# Altium PCB humilityDetector.PcbDoc
Units mil, origin at the board's own origin, x right, y up, seen from the top; angles counter-clockwise.
Board outline 11837.4 x 9083.86 mil, 2 copper layers (Top Layer, Top, Bottom Layer, Bottom); 29 components, 21 nets, 102 pads, 1 vias.
Unrouted connection lines stored in the file: 1.
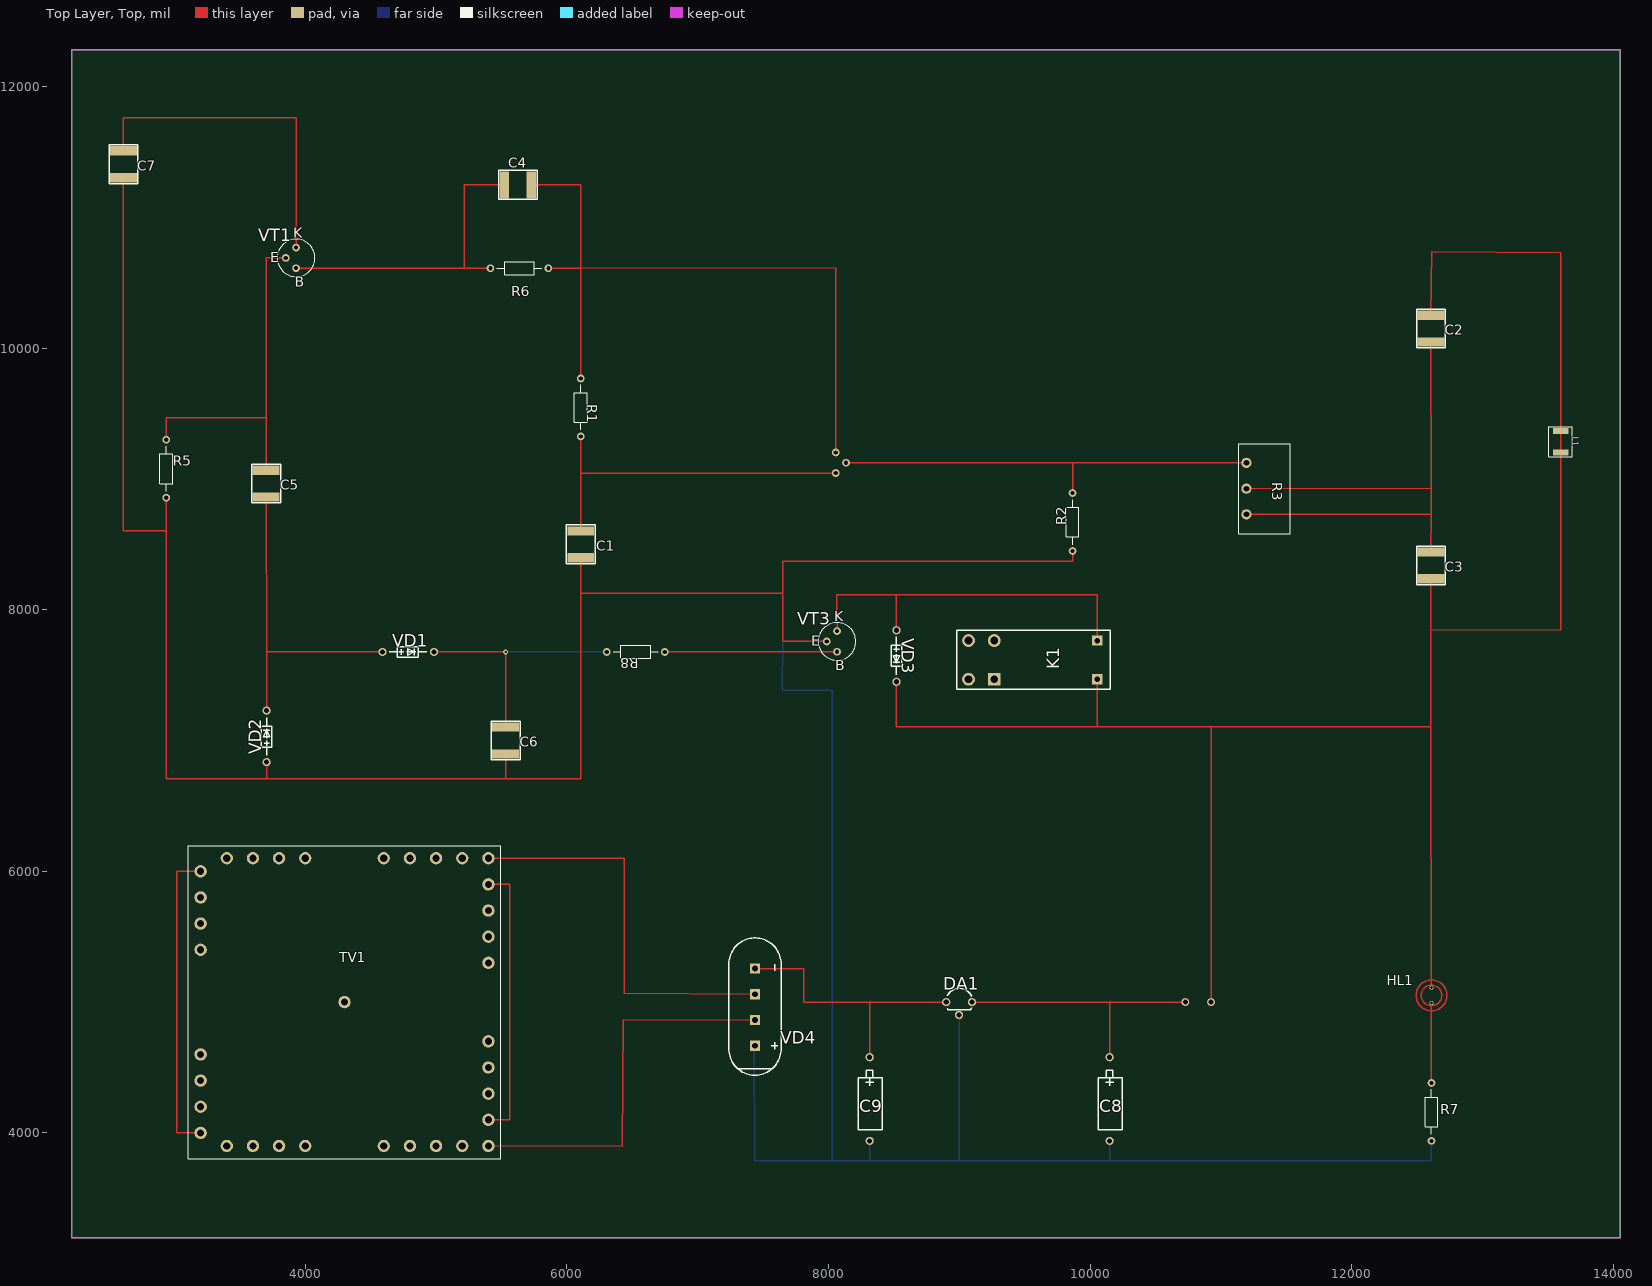
[diagram p0: Top Layer, Top view]
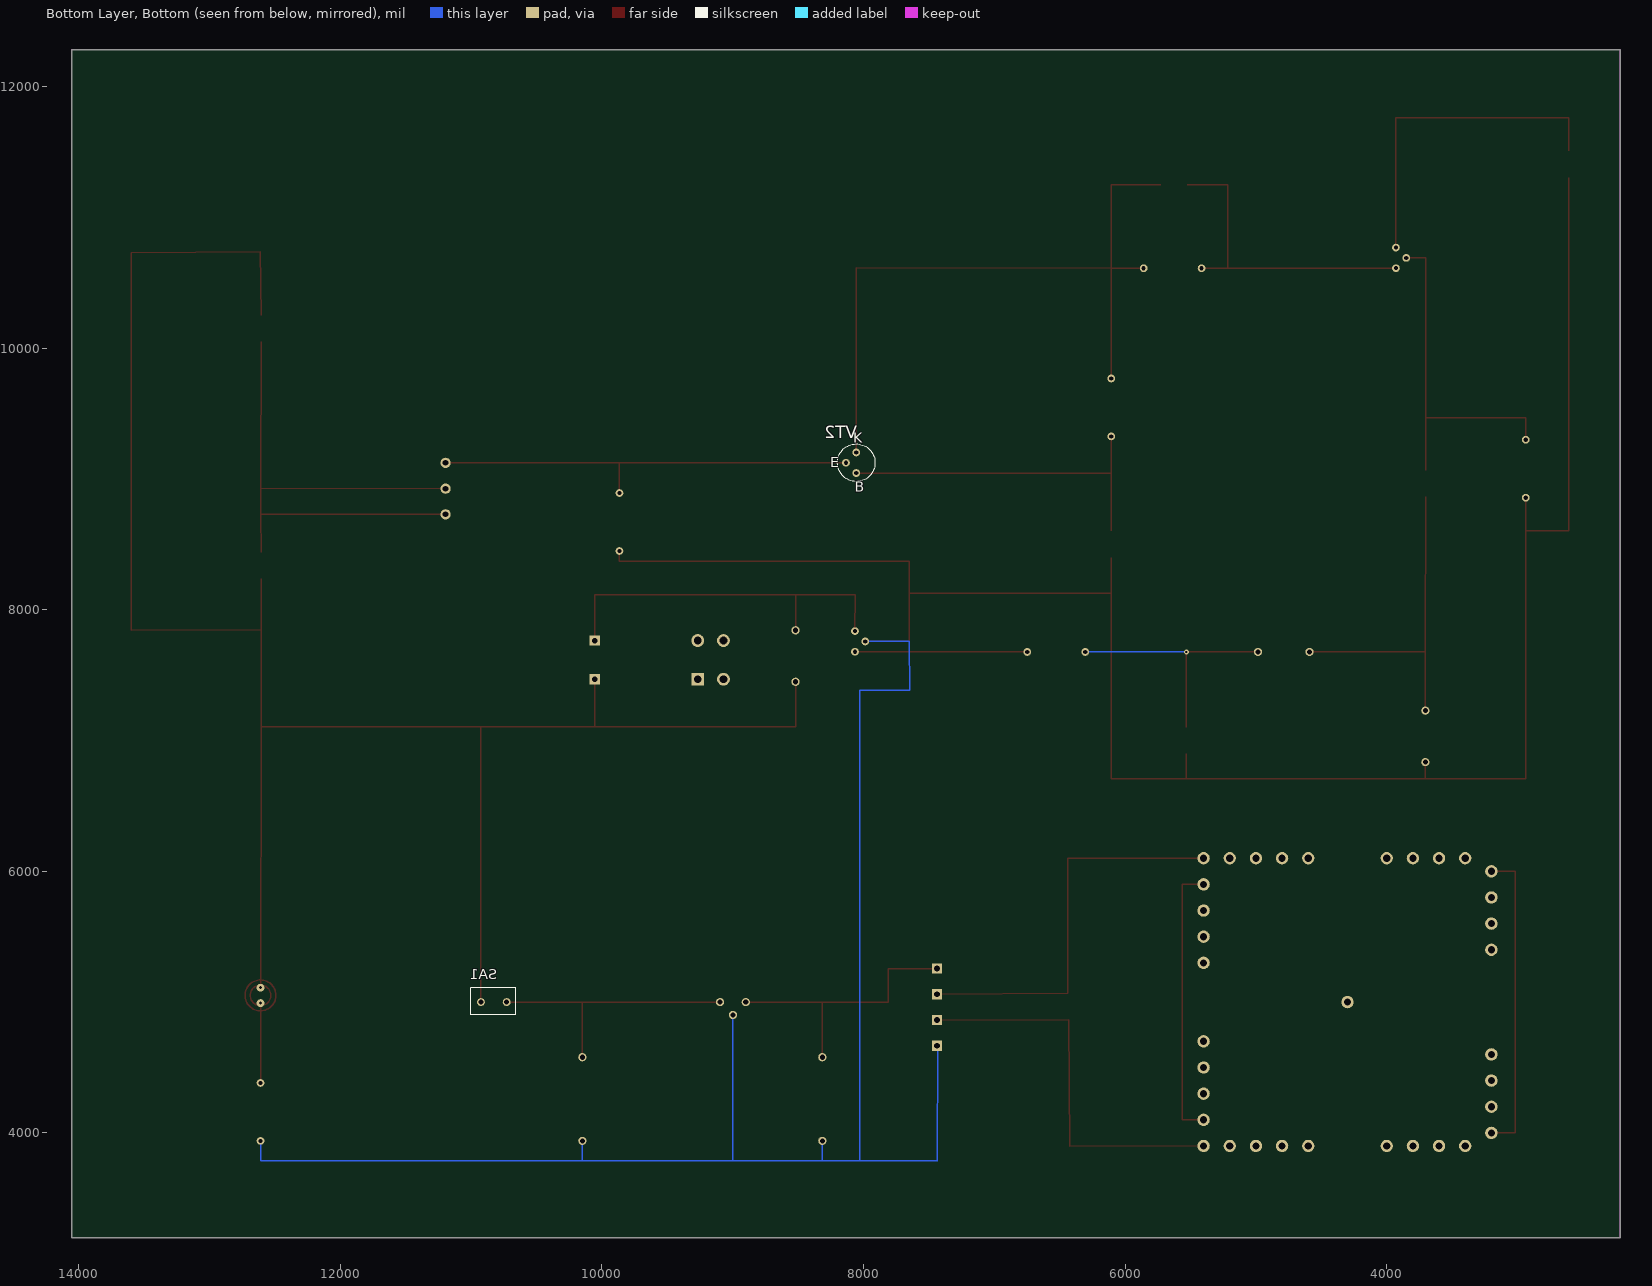
[diagram p1: Bottom Layer, Bottom view, seen from below]

## Layer stack, top to bottom
Top Solder, Top Mask: solder mask 0.4, Solder Resist, Dk 3.5
Top Layer, Top: signal copper 1.4
Dielectric 1: dielectric 12.6, FR-4, Dk 4.8
Bottom Layer, Bottom: signal copper 1.4
Bottom Solder, Bot Mask: solder mask 0.4, Solder Resist, Dk 3.5

## Board outline
2215.35,12280.32 2215.35,3196.46 14052.76,3196.46 14052.76,12280.32

## Design rules (kind name [scope] priority, off if disabled: settings)
Clearance [All] p1: gap=10 ignorepadtopadclearanceinfootprint=FALSE except(0: Arc-Hole Track-Hole SMDPad-Hole THPad-Hole Via-Hole Fill-Hole Poly-Hole Region-Hole Text-Hole; 11.81: Arc-Arc Arc-Track Arc-THPad Arc-Via Track-Track Track-THPad Track-Via THPad-THPad THPad-Via Via-Via)
PlaneClearance [All] p1: clearance=10
PolygonConnect [All] p1: connectstyle=Relief reliefconductorwidth=10 reliefentries=4 polygonreliefangle="90 Angle" airgapwidth=10
RoutingVias [All] p1: holewidth=28 width=50 viastyle="Through Hole" minholewidth=28 minwidth=50 maxholewidth=28 maxwidth=50
SolderMaskExpansion [All] p1: expansion=4 istentingtop=FALSE
Width [All] p1: maxlimit=10 minlimit=10 preferedwidth=10
29 further rules are at their usual default settings.

## Components (designator, comment, footprint, x,y, rotation, side; value= is the part's Value field where it differs from the comment)
C1 "0,22mk" CC2220 6106.3,8500 r270 top
C2 "0,1mk" CC2220 12606.3,10149.61 r270 top
C3 "0,22mk" CC2220 12606.3,8338.58 r270 top
C4 "1000" CC2220 5625.98,11248.03 r0 top
C5 "0,1mk" CC2220 3700.79,8964.57 r270 top
C6 "" CC2220 5531.5,7000 r270 top
C7 "0,22mk" CC2220 2610.24,11405.51 r270 top
C8 "100mk" K534A-1 10149.61,4578.74 r270 top
C9 "1000mk" K534A-1 8314.96,4578.74 r270 top
DA1 "" KT26-3 8900,5000 r0 top
HL1 "" АЛЗ07Б_АЛЗ07Б(Primary) 12610.24,5110.24 r270 top
K1 "" REK53 10055.12,7468.5 r0 top
L1 "4.7u" 1812CS 13598.43,9283.46 r270 top
R1 "220k" C2-33H-0.125W 6106.3,9767.72 r270 top
R2 "4,7k" C2-33H-0.125W 9866.14,8448.82 r90 top
R3 "4,7k" 16K1 11195.67,9122.44 r270 top
R5 "10k" C2-33H-0.125W 2937.01,9299.21 r270 top
R6 "1,8k" C2-33H-0.125W 5858.27,10610.24 r180 top
R7 "560" C2-33H-0.125W 12610.24,4381.89 r270 top
R8 "1,8k" C2-33H-0.125W 6748.03,7677.17 r180 top
SA1 "" 8AS9M2RE 10925.2,5000 r180 bottom
TV1 "" 70000_72400_SERIES 3200,4200 r0 top
VD1 "" VDD10_Primary 4984.25,7677.17 r0 top
VD2 "" VDD10_Primary 3704.72,7228.35 r90 top
VD3 "" VDD10_Primary 8519.68,7448.82 r270 top
VD4 "" KC412 7438.19,4666.14 r90 top
VT1 "" КТ312_КТ312(Primary) 3929.92,10768.5 r0 top
VT2 "" КТ312_КТ312(Primary) 8055.91,9202.36 r180 bottom
VT3 "" КТ312_КТ312(Primary) 8065.35,7836.22 r0 top

## Footprints (in the part's own frame and the unit in brackets; to place one, negate y for a bottom-side part, rotate by r counter-clockwise, add the part's x,y. Pads: shape width x height; smd on the part's side, far side on the other; paste and mask are expansions set on the pad)
8AS9M2RE [mil]
  round 60 hole 38: 1(0,0) 2(196.85,0)
  silkscreen extent -79,-98 266,108
16K1 [mm]
  round 2 hole 1.1: 1(0,0) 2(10,0) 3(5,0)
  silkscreen extent -3.75,-1.5 13.75,8.5
1812CS [mm]
  rect 1.15x3.05 smd: 1(-2.075,0) 2(2.075,0)
  silkscreen extent -2.9,-2.28 2.9,2.28
70000_72400_SERIES [mm]
  round 2.4 hole 1.4: 1(10.16,48.26) 2(5.08,48.26) 3(0,45.72) 4(0,40.64) 5(0,0) 6(0,-5.08) 7(5.08,-7.62) 8(10.16,-7.62) 9(45.72,-7.62) 10(50.8,-7.62) 11(55.88,-7.62) 12(55.88,-2.54) 13(55.88,43.18) 14(55.88,48.26) 15(50.8,48.26) 16(45.72,48.26) 17(55.88,2.54) 18(55.88,38.1) 19(0,35.56) 20(0,5.08) 21(15.24,-7.62) 22(40.64,-7.62) 23(55.88,7.62) 24(55.88,33.02) 25(40.64,48.26) 26(15.24,48.26) 27(0,30.48) 28(0,10.16) 29(20.32,-7.62) 30(35.56,-7.62) 31(55.88,12.7) 32(55.88,27.94) 33(35.56,48.26) 34(20.32,48.26) 35(27.94,20.32)
  silkscreen extent -2.44,-10.06 58.32,50.7
C2-33H-0.125W [mm]
  round 1.5 hole 0.8: 1(0,0) 2(11.25,0)
  silkscreen extent 1.25,-1.25 10,1.25
CC2220 [mm]
  rect 1.8x5.2 smd: 1(-2.6,0) 2(2.6,0)
  silkscreen extent -3.75,-2.8 3.75,2.8
K534A-1 [mm]
  round 1.6 hole 1: 1(0,0) 2(16.25,0)
  silkscreen extent 2.54,-2.18 14.12,2.44
KC412 [mm]
  rect 2x2 hole 1.1: 1(0,0) 2(5,0) 3(15,0) 4(10,0)
  silkscreen extent -5.71,-5.08 20.95,5.08
KT26-3 [mm]
  round 1.6 hole 1: 1(0,0) 2(2.5,-2.5) 3(5,0)
  silkscreen extent 0.19,-1.5 4.95,2.65
REK53 [mm]
  rect 2x2 hole 1.1: 1(0,0) 2(0,7.5)
  rect 2.5x2.5 hole 1.5: 3(-20,0)
  round 2.5 hole 1.5: 4(-25,0) 5(-20,7.5) 6(-25,7.5)
  silkscreen extent -27.3,-1.91 2.54,9.53
VDD10_Primary [mm]
  round 1.6 hole 1: 1(0,0) 2(-10,0)
  silkscreen extent -8.71,-1.02 -1.4,1.02
АЛЗ07Б_АЛЗ07Б(Primary) [mm]
  round 0.8 / inner round 1.524 / far side round 1.524 hole 0.6: 0(0,0) 1(3,0)
  Top Layer, Top circle w0.254: c1.5,0 r2
  Top Layer, Top circle w0.254: c1.5,0 r3
КТ312_КТ312(Primary) [mm]
  round 1.5 hole 0.8: B(0,-4) E(-2,-2) K(0,0)
  silkscreen extent -3.65,-5.65 3.65,1.65

## Via types
v1: diameter 40, hole 18, Top Layer, Top to Bottom Layer, Bottom, 1 vias

## Nets (pads, with @x,y where several pads share a name; then routed paths per layer and width w, separated by ;. In a path a pad name is that pad's centre, name@x,y a point inside that pad or via, vN(x,y) a via of type N, cw(c..) or ccw(c..) an arc to the next point about the centre after c; other vN are vias at no path point)
+220B: TV1.3 TV1.6 | length 2362.6
  Top Layer, Top w10: TV1.6 3018.9,3999.61 3018.9,6000 TV1.3
GND: C1.2 C6.2 C7.2 C8.2 C9.2 DA1.2 R2.1 R5.2 R7.2 VD2.2 VD4.1 VT3.E | length 27825.8
  Top Layer, Top w10: C7.2 2610.24,8602.36 2937.01,8602.36 ; R5.2 2937.01,8602.36 ; VD2.2 3704.72,6708.66 ; C6.2 5531.5,6708.66 ; C1.2 6106.3,8125.98 ; VT3.E 7648.82,7757.48 ; R2.1 9865.75,8448.43 9866.14,8368.9 7649.21,8370.08 7648.82,7757.48 ; 2937.01,8602.36 2937.01,6708.66 3704.72,6708.66 ; 3704.72,6708.66 5531.5,6708.66 ; 5531.5,6708.66 6106.3,6708.66 6106.3,8125.98 ; 6106.3,8125.98 7649.21,8124.8 7648.82,7757.48
  Bottom Layer, Bottom w10: 7433.07,3787.4 7438.19,3787.4 ; VD4.1 7433.07,4666.14 7438.19,3787.4 ; VT3.E 7980.31,7757.48 7648.82,7757.48 7646.85,7383.86 8029.53,7383.86 8028.35,3788.19 ; C9.2 8314.96,3787.4 ; DA1.2 9000,3787.4 ; C8.2 10149.61,3787.4 ; R7.2 12610.24,3787.4 10149.61,3787.4 ; 7438.19,3787.4 8028.35,3788.19 ; 8028.35,3788.19 8314.96,3787.4 ; 8314.96,3787.4 9000,3787.4 ; 9000,3787.4 10149.61,3787.4
NET00000: C2.1 C3.2 HL1.0 K1.1 L1.1 L1.2 SA1.1 VD3.1 | length 15370.2
  Top Layer, Top w10: VD3.1 8519.68,7106.3 10055.12,7106.3 ; K1.1 10055.12,7106.3 ; SA1.1 10925.2,7106.3 ; C3.2 12606.3,7846.46 ; C2.1 12614.17,10736.22 13598.43,10728.35 L1.1 L1.2 13598.43,9200.79 13598.43,7842.52 12606.3,7846.46 ; HL1.0 12606.3,7106.3 ; 10055.12,7106.3 10925.2,7106.3 ; 10925.2,7106.3 12606.3,7106.3 ; 12606.3,7106.3 12606.3,7846.46
NET00013: C7.1 VT1.K | length 2562.2
  Top Layer, Top w10: C7.1 2610.24,11759.84 3929.13,11759.84 3929.13,10791.34 VT1.K
NET00014: C5.1 R5.1 VT1.E | length 2705.5
  Top Layer, Top w10: R5.1 2937.01,9468.5 3700.79,9468.5 ; C5.1 3700.79,9468.5 ; VT1.E 3701.18,10689.37 3700.79,9468.5
NET00015: C5.2 VD1.2 VD2.1 | length 2519.7
  Top Layer, Top w10: C5.2 3704.72,7677.17 ; VD2.1 3704.72,7677.17 ; VD1.2 3704.72,7677.17
NET00016: C6.1 R8.2 VD1.1 | length 1895.7
  Top Layer, Top w10: VD1.1 v1(5531.5,7677.17) C6.1
  Bottom Layer, Bottom w10: v1(5531.5,7677.17) R8.2
NET00017: C4.1 R6.2 VT1.B | length 2630.7
  Top Layer, Top w10: VT1.B 3929.92,10610.24 5216.54,10610.92 ; C4.1 5216.54,11248.03 5216.54,10610.92 ; 5216.54,10610.92 5415.35,10611.02 R6.2 5216.54,10610.24 5216.54,10610.92
NET00019: C1.1 R1.2 VT2.B | length 2690.7
  Top Layer, Top w10: C1.1 6106.3,9044.88 ; VT2.B 6106.3,9044.88 ; 6106.3,9044.88 R1.2@6106.3,9307.09 ; R1.2@6106.3,9307.09 R1.2 6106.69,9325.2 R1.2@6106.3,9307.09
NET00020: R8.1 VT3.B | length 1317.3
  Top Layer, Top w10: R8.1 VT3.B
NET00021: K1.2 VD3.2 VT3.K | length 2890.6
  Top Layer, Top w10: VT3.K 8064.57,8114.17 8519.68,8114.17 ; VD3.2 8519.68,8114.17 ; K1.2 10055.12,8114.17 8519.68,8114.17
NET00023: R2.2 R3.1 VT2.E | length 3293.7
  Top Layer, Top w10: VT2.E 9866.14,9122.44 ; R2.2@9866.14,8889.76 R2.2 9866.14,9122.44 ; R3.1 9866.14,9122.44
NET00024: C2.2 C3.1 R3.2 R3.3 | length 4430.7
  Top Layer, Top w10: R3.2 12607.87,8730.71 ; R3.3 12607.87,8926.77 ; C3.1 12607.87,8730.71 ; C2.2 12607.87,8926.77 ; 12607.87,8730.71 12607.87,8926.77
NET00026: C4.2 R1.1 R6.1 VT2.K | length 5466.9
  Top Layer, Top w10: C4.2 6106.3,11248.03 6106.3,10610.24 ; R6.1 6106.3,10610.24 ; R1.1 6106.3,10610.24 ; VT2.K 8055.12,10614.17 6106.3,10610.24
NET00027: HL1.1 R7.1 | length 610.2
  Top Layer, Top w10: R7.1 HL1.1
NET00029: C8.1 DA1.3 SA1.2 | length 2052.8
  Top Layer, Top w10: DA1.3 10149.61,5000 ; C8.1 10149.61,5000 ; SA1.2 10149.61,5000
NET00031: C9.1 DA1.1 VD4.3 | length 2139
  Top Layer, Top w10: VD4.3 7452.76,5255.91 7811.02,5255.91 7811.02,5000 8314.96,5000 ; C9.1 8314.96,5000 ; DA1.1 8314.96,5000
NET00034: TV1.14 VD4.4 | length 3068.5
  Top Layer, Top w10: TV1.14 6437.01,6098.43 6437.8,5067.32 VD4.4
NET00035: TV1.11 VD4.2 | length 2997.3
  Top Layer, Top w10: TV1.11 6425.2,3897.64 6432.68,4864.17 VD4.2
NET00036: TV1.12 TV1.13 | length 2125.2
  Top Layer, Top w10: TV1.12 5562.2,4100.39 5562.99,5900.39 TV1.13
NET00037: TV1.4 TV1.5
pads on no net: K1.3 K1.4 K1.5 K1.6 TV1.1 TV1.2 TV1.7 TV1.8 TV1.9 TV1.10 TV1.15 TV1.16 TV1.17 TV1.18 TV1.19 TV1.20 TV1.21 TV1.22 TV1.23 TV1.24 TV1.25 TV1.26 TV1.27 TV1.28 TV1.29 TV1.30 TV1.31 TV1.32 TV1.33 TV1.34 TV1.35

## Keep-outs
Keep-Out Layer, Board:
  the board outline again, w5

## Text inside footprints (layer, text, board x,y; h text height)
K1: Mechanical 1, Top Assy "1" at 9312.15,7394.29 h125
VT1: Top Overlay, Top Silk "K" at 3907.96,10842.81 h78.12; Top Overlay, Top Silk "B" at 3917.8,10468.8 h78.12; Top Overlay, Top Silk "E" at 3732.39,10655.81 h78.12
VT2: Bottom Overlay, Bot Silk "K" at 8077.87,9276.67 h78.12; Bottom Overlay, Bot Silk "B" at 8068.02,8902.66 h78.12; Bottom Overlay, Bot Silk "E" at 8253.43,9089.67 h78.12
VT3: Top Overlay, Top Silk "K" at 8043.39,7910.53 h78.12; Top Overlay, Top Silk "B" at 8053.24,7536.52 h78.12; Top Overlay, Top Silk "E" at 7867.83,7723.52 h78.12